# Altium PCB bch-stmnode_v0.2.PcbDoc (part 2 of 3)
Units mm, origin at the board's own origin, x right, y up, seen from the top; angles counter-clockwise.
Board outline 93.3 x 100 mm, 4 copper layers (Top Layer, GND, VCC, Bot Layer), stack 1.564 mm thick; 151 components, 115 nets, 605 pads, 422 vias.
Unrouted connection lines stored in the file: 4.
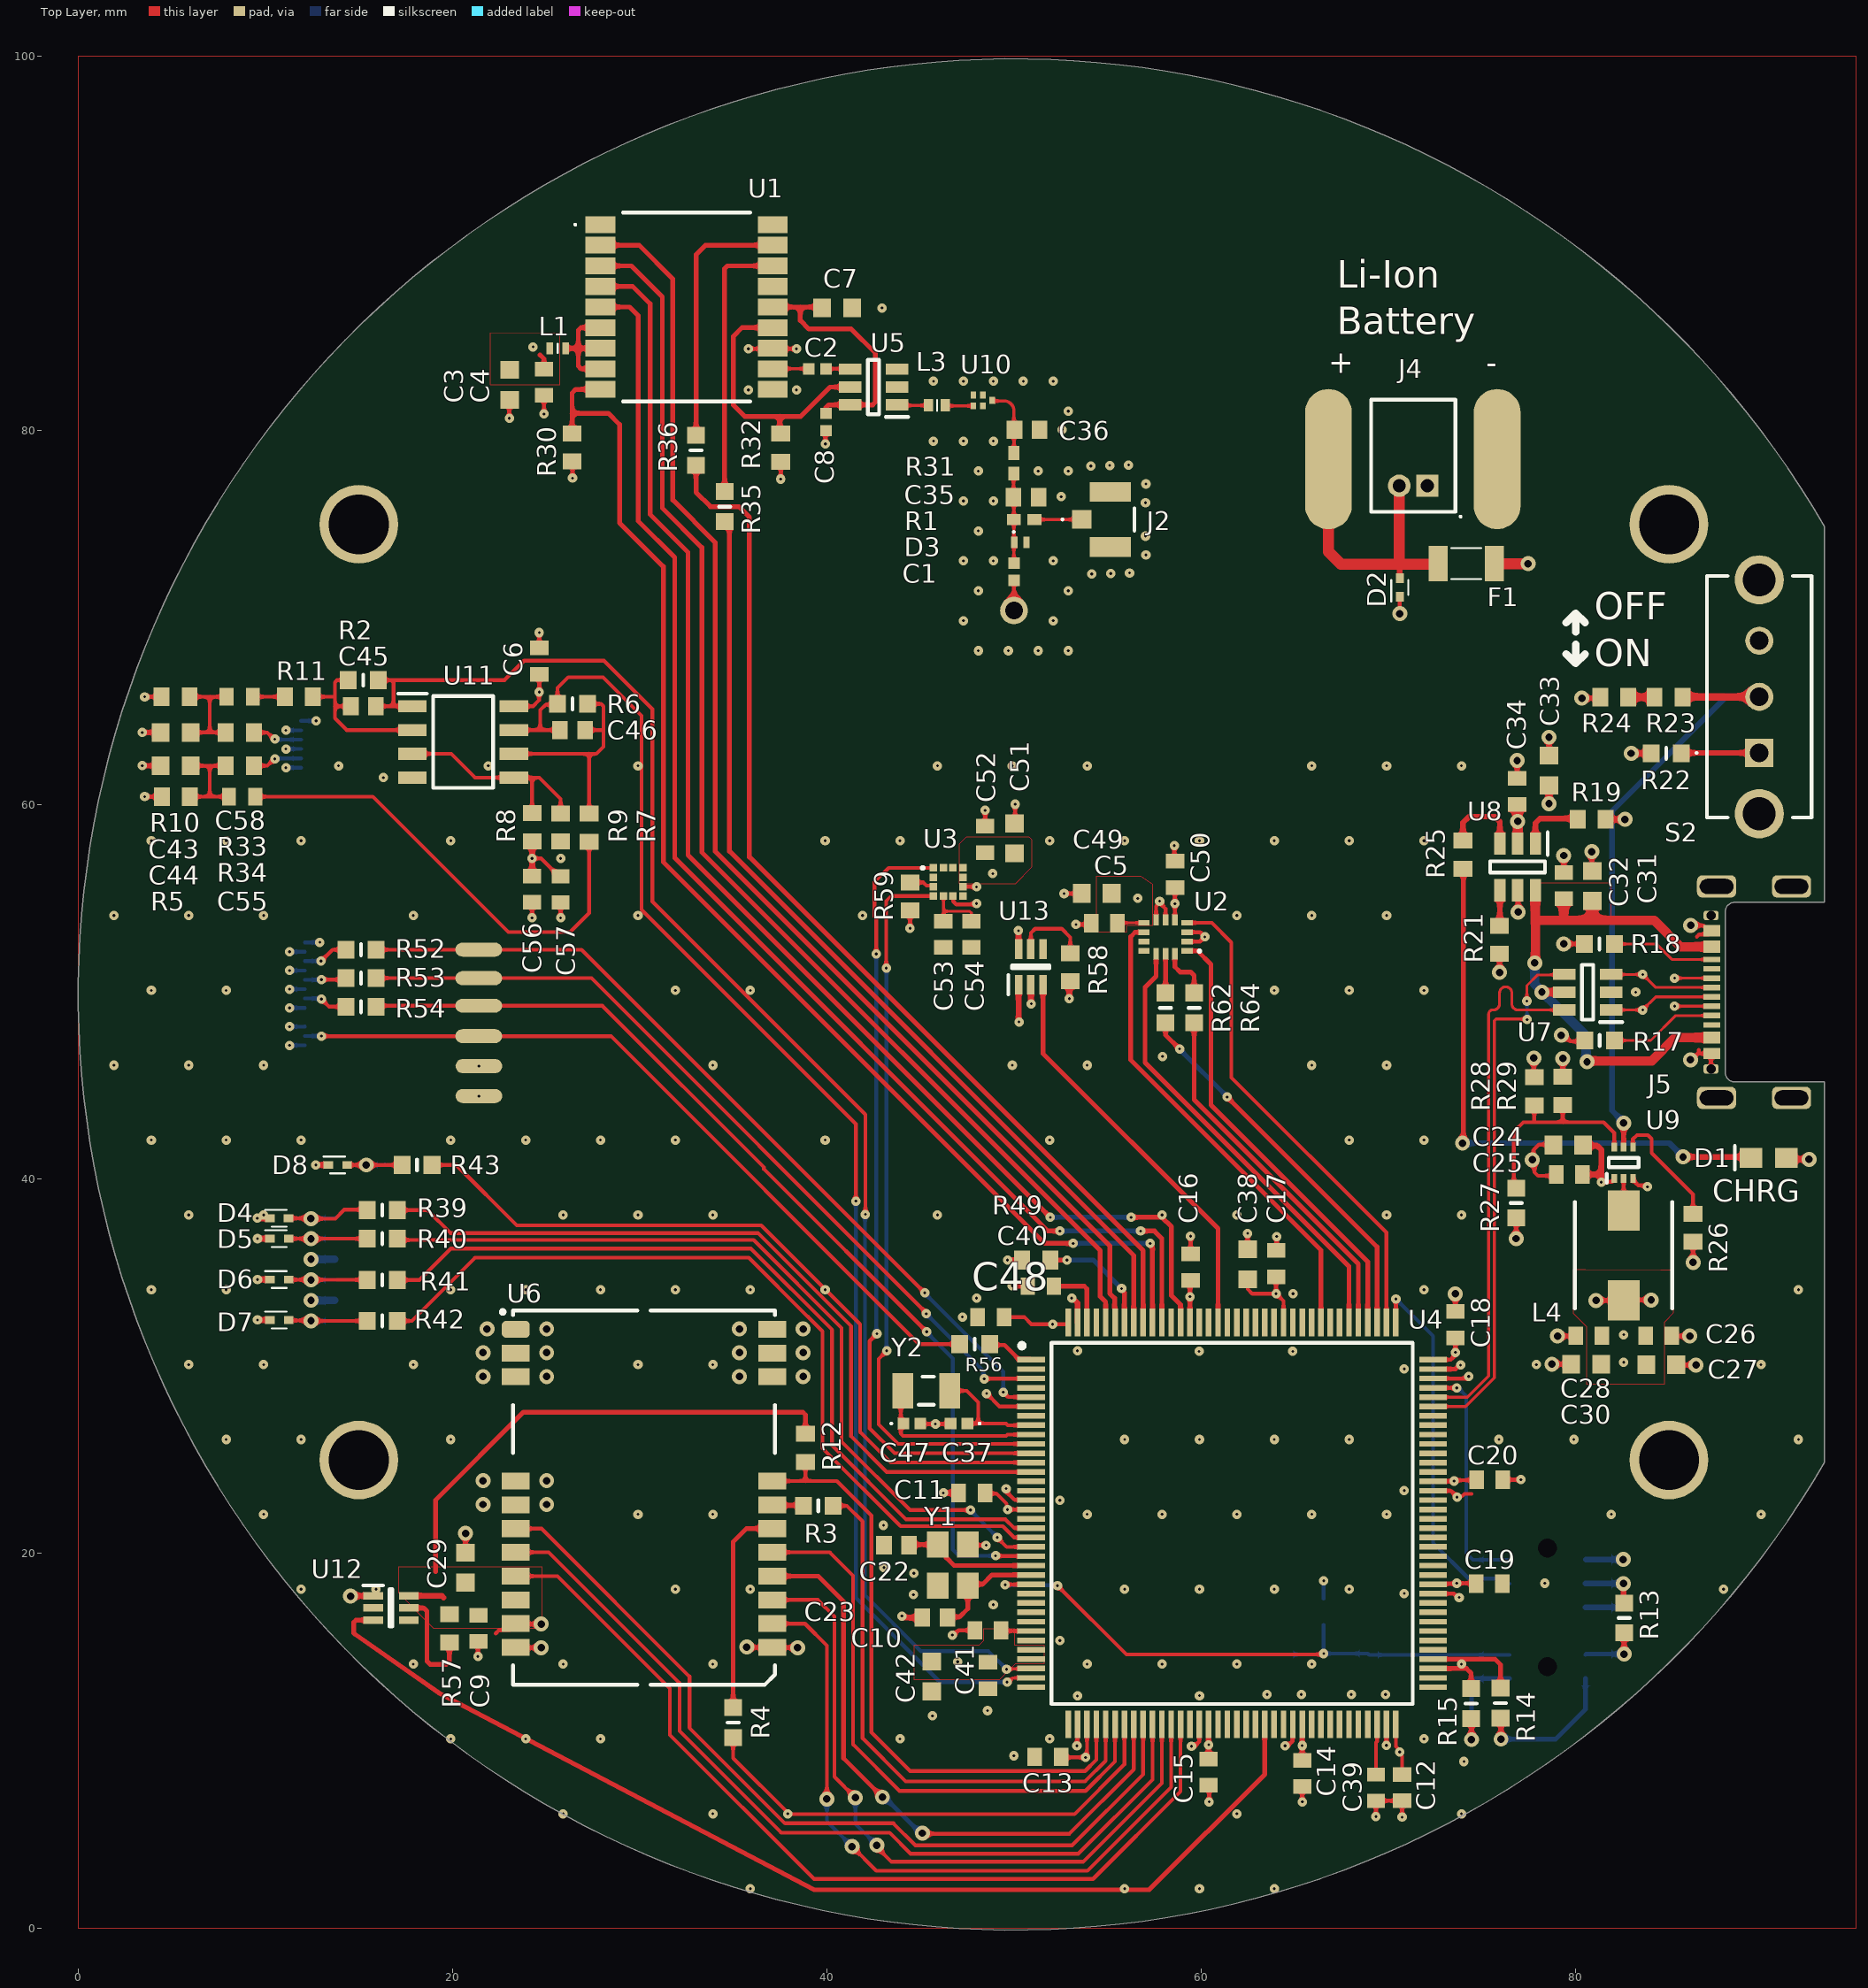
[diagram p0: Top Layer view]

## Part data (continued)
U4: "STM32H563ZIT6", Manufacturer_Name=STMicroelectronics, Mouser Part Number=511-STM32H563ZIT6, Arrow Part Number=STM32H563ZIT6, Arrow Price/Stock=https://www.arrow.com/en/products/stm32h563zit6/stmicroelectronics?utm_currency=USD&region=nac, Datasheet Link=https://www.st.com/resource/en/datasheet/stm32h562ag.pdf, Height=1.6mm, Manufacturer_Part_Number=STM32H563ZIT6, Mouser Price/Stock=https://www.mouser.co.uk/ProductDetail/STMicroelectronics/STM32H563ZIT6?qs=amGC7iS6iy9kqsV9OIos2w%3D%3D
U5: "1.55GHz~1.615GHz 21.5dB 1.4V~3.6V 0.8dB -14dBm 4.3mA DFN-6(1x1.6) RF Amplifiers RoHS", Manufacturer_Name="Hangzhou ZhongKe Microelectronics", Manufacturer_Part_Number=AT2659S, Datasheet Link=http://lanzhi-tech.com/filedownload/89817, Height=1.25mm
U6: library part EMCU+E22-900M22S, "-147dBm 22.3dBm 7km SPI SMD,14x20mm LoRa Modules ROHS"
U7: library part EU+ESDUSBLC6, "Low Cap. ESD Protection Auto SOT-23-6 STMicroelectronics USBLC6-2SC6Y, Dual Uni-Directional TVS Diode Array, 6-Pin SOT-23", Manufacturer_Name=STMicroelectronics, Mouser Part Number=511-USBLC6-2SC6Y, Arrow Part Number=USBLC6-2SC6Y, Arrow Price/Stock=https://www.arrow.com/en/products/usblc6-2sc6y/stmicroelectronics.html?utm_currency=USD&region=nac, Datasheet Link=https://www.st.com/resource/en/datasheet/usblc6-2sc6y.pdf, Geometry.Height=1.45mm, Manufacturer_Part_Number=USBLC6-2SC6Y, Mouser Price/Stock=https://www.mouser.co.uk/ProductDetail/STMicroelectronics/USBLC6-2SC6Y?qs=gNDSiZmRJS%2FOgDexvXkdow%3D%3D
U8: library part EU+BQ21040DBVR, "Battery Management 1-cell 0.8-A Li-ion and Li-polymer batt A 595-BQ21040DBVT", Manufacturer_Name="Texas Instruments", Mouser Part Number=595-BQ21040DBVR, Arrow Part Number=BQ21040DBVR, Arrow Price/Stock=https://www.arrow.com/en/products/bq21040dbvr/texas-instruments?utm_currency=USD&region=nac, Datasheet Link=http://www.ti.com/lit/gpn/bq21040, Height=1.45mm, Manufacturer_Part_Number=BQ21040DBVR, Mouser Price/Stock=https://www.mouser.co.uk/ProductDetail/Texas-Instruments/BQ21040DBVR?qs=cttFivMKqWyovUuY6Xwwcw%3D%3D
U9: library part EU+TPS563252DRLR, "Switching Voltage Regulators 3-V to 17-V input vo ltage 3-A 1.2-Mhz", Manufacturer_Name="Texas Instruments", Mouser Part Number=595-TPS563252DRLR, Arrow Part Number=TPS563252DRLR, Arrow Price/Stock=https://www.arrow.com/en/products/tps563252drlr/texas-instruments?utm_currency=USD&region=nac, Datasheet Link=https://www.ti.com/lit/ds/symlink/tps563252.pdf?ts=1715244064437&ref_url=https%253A%252F%252Fwww.mouser.in%252F, Height=0.6mm, Manufacturer_Part_Number=TPS563252DRLR, Mouser Price/Stock=https://www.mouser.co.uk/ProductDetail/Texas-Instruments/TPS563252DRLR?qs=ulEaXIWI0c%252BIcG7y3AlP5A%3D%3D
U10: library part EU+GNSSSAW, "Signal Conditioning - 40 C to + 85 C 1.5824 GHz 1 dB 2 MHz, 4.092 MHz, 8.34 MHz 50 Ohms GNSS", Arrow Part Number=B39162B4327P810, Manufacturer_Name=RF360, Mouser Part Number=871-B39162B4327P810, Arrow Price/Stock=https://www.arrow.com/en/products/b39162b4327p810/qualcomm-rf360-a-qualcomm-tdk-joint-venture?region=nac, Datasheet Link=https://mm.digikey.com/Volume0/opasdata/d220001/medias/docus/992/B39162B4327P810_Rev2.2.pdf, Height=0.45mm, Manufacturer_Part_Number=B39162B4327P810, Mouser Price/Stock=https://www.mouser.co.uk/ProductDetail/RF360/B39162B4327P810?qs=lGUynpphgXxwtn5A8O%2FIyg%3D%3D
U11: library part EU+OPA2607IDR, "Operational Amplifiers - Op Amps Dual-channel low-po wer precision 50-M", Arrow Part Number=OPA2607IDR, Manufacturer_Name="Texas Instruments", Mouser Part Number=595-OPA2607IDR, Arrow Price/Stock=https://www.arrow.com/en/products/opa2607idr/texas-instruments, Datasheet Link=https://www.ti.com/lit/ds/symlink/opa2607.pdf, Height=1.75mm, Manufacturer_Part_Number=OPA2607IDR, Mouser Price/Stock=https://www.mouser.co.uk/ProductDetail/Texas-Instruments/OPA2607IDR?qs=zW32dvEIR3ss%2FpWvIqcTXw%3D%3D
U12 U13: library part EU+TPS22919, "Power Switch ICs - Power Distribution 1-ch 5.5V 1.5A 90 mOhm self-protected AE", Manufacturer_Name="Texas Instruments", Manufacturer_Part_Number=TPS22919QDCKRQ1, Mouser Part Number=595-TPS22919QDCKRQ1, Datasheet Link=https://www.ti.com/lit/gpn/tps22919-q1, Height=1.1mm, Mouser Price/Stock=https://cz.mouser.com/ProductDetail/Texas-Instruments/TPS22919QDCKRQ1?qs=sGAEpiMZZMvjbjwkTuU2aX%252BB0PF2SxcjkwPe0jmTNxcgLPqTFcsPcA%3D%3D
Y1: library part ECR+24MHZ, "Crystals WE-XTAL 24.0MHz 15ppm 3.2 x 2.5mm", Manufacturer_Name="Wurth Elektronik", Manufacturer_Part_Number=830107006509, Mouser Part Number=710-830107006509, Datasheet Link=https://www.we-online.com/catalog/datasheet/830107006509.pdf, Height=0.8mm, Mouser Price/Stock=https://www.mouser.co.uk/ProductDetail/Wurth-Elektronik/830107006509?qs=hWgE7mdIu5QkYkvr4tcl2g%3D%3D
Y2: library part ECR+32.768KHz, "Crystals WE-XTAL 32.768 kHz 7pF 70kOhms", Manufacturer_Name="Wurth Elektronik", Manufacturer_Part_Number=830009709, Mouser Part Number=710-830009709, Datasheet Link=https://www.we-online.com/catalog/datasheet/830009709.pdf, Height=0.9mm, Mouser Price/Stock=https://www.mouser.co.uk/ProductDetail/Wurth-Elektronik/830009709?qs=2WXlatMagcG5opfa%252B%2FO2MQ%3D%3D

## Free pads (board coordinates)
  oval 2.5x7.5 smd: 4(66.802,78.486) 4(75.819,78.486)
  oval 2.5x0.75 smd: 5(21.406,52.273) 6(21.406,50.749) 7(21.406,49.276) 8(21.406,47.65) 8(21.413,44.45) 8(21.413,46.05)

## Via types
v1: diameter 0.5, hole 0.15, Top Layer to Bot Layer, 346 vias
v2: diameter 0.8, hole 0.4, Top Layer to Bot Layer, 76 vias

## Nets (pads, with @x,y where several pads share a name; then routed paths per layer and width w, separated by ;. In a path a pad name is that pad's centre, name@x,y a point inside that pad or via, vN(x,y) a via of type N, cw(c..) or ccw(c..) an arc to the next point about the centre after c; other vN are vias at no path point)
1PPS: U1.4 U4.132 | length 72.7
  Top Layer w0.254: U1.4@27.912,87.714 29.634,87.714 30.556,86.792 30.556,75.54 32.588,73.508 32.588,57.324 51.939,37.973 v1(51.943,37.973) ; v1(56.261,37.973) 57.912,37.973 58.42,37.465 58.42,33.782 58.902,33.3 U4.132@58.902,32.348
  Bot Layer w0.254: v1(51.943,37.973) v1(56.261,37.973)
1V65_REF_7: R8.1 R9.2 U11.3 U11.5 | length 11.6
  Top Layer w0.2: U11.3@17.863,62.738 19.939,62.738 21.209,61.468 U11.5@23.285,61.468 24.257,61.468 ; R8.1@24.257,59.563 24.257,61.468 ; R9.2@25.781,59.551 25.781,60.325 24.638,61.468 24.257,61.468
+3V: C3.1 C4.1 C6.1 C10.1 C11.1 C12.1 C13.1 C14.1 C15.1 C16.1 C17.1 C18.1 C19.1 C20.1 C26.1 C27.1 C28.1 C30.1 C38.1 C41.1 C42.1 C48.1 C56.1 C57.1 J3.3 J6.4 J10.1 J11.1 L1.1 L4.2 pad.8@21.413,44.45 R5.2 R8.2 R10.2 R26.2 R27.2 R30.2 U4.6 U4.17 U4.30 U4.32 U4.33 U4.39 U4.52 U4.62 U4.72 U4.84 U4.95 U4.106 U4.108 U4.121 U4.131 U4.144 U11.8 U12.1 U13.1 | length 60.1
  Top Layer w0.2: v1(3.556,60.452) R5.2@4.469,60.452 ; v1(3.556,65.786) R10.2@4.457,65.786 ; U11.8@23.285,65.278 24.308,65.278 24.627,65.597 24.627,66.029 v1(24.638,66.04) C6.1@24.638,66.991 ; v1(24.257,57.15) 24.735,57.15 25.686,56.199 C57.1@25.781,56.199 ; R30.2@26.391,78.358 26.416,78.332 v1(26.416,77.47) ; C11.1@48.452,23.241 48.485,23.208 49.055,23.208 49.6,22.663 49.6,22.409 v1(49.657,22.352) 49.661,22.356 50.91,22.356 U4.17@50.914,22.36 ; v1(48.539,28.55) 49.229,27.86 U4.6@50.914,27.86 ; C10.1@49.316,15.9 49.356,15.86 U4.30@50.914,15.86 ; C48.1@49.468,32.639 50.546,32.639 50.927,32.258 v1(52.07,32.258) 52.852,32.258 52.902,32.308 U4.144@52.902,32.348 ; C13.1@52.516,9.144 52.516,9.109 v1(53.825,9.109) 53.825,9.19 53.902,9.268 U4.39@53.902,10.872 ; C38.1@62.484,34.658 62.484,34.138 62.732,33.89 v1(64.008,33.89) ; C17.1@64.008,34.795 v1(64.008,33.89) ; U4.121@64.402,32.348 64.402,33.496 v1(64.008,33.89) ; U4.72@70.402,10.872 70.402,9.689 70.612,9.479 70.612,9.317 70.739,9.19 C12.1@70.739,8.193 ; U4.84@72.39,18.36 72.418,18.387 73.632,18.387 v1(73.66,18.415) 74.673,18.415 C19.1@74.691,18.397 ; U4.95@72.39,23.86 72.398,23.868 73.508,23.868 v1(73.516,23.876) ; U4.106@72.39,29.36 72.396,29.354 74.104,29.354 74.214,29.464 v1(74.295,29.464) ; U4.108@72.39,30.36 73.343,30.36 73.531,30.547 73.531,30.691 v1(73.588,30.748) ; v1@73.516,23.86 73.582,23.927 74.687,23.927 C20.1@74.713,23.952 ; C18.1@73.584,31.533 73.588,31.528 v1@73.588,30.677 ; v2(76.835,36.83) R27.2@76.835,37.935 ; v2(81.102,33.528) 82.562,33.528 L4.2@82.575,33.541 82.588,33.554 v2(84.049,33.554) ; v2(86.284,35.559) R26.2@86.284,36.664
  Top Layer w0.25: U4.131@59.402,32.348 59.402,34.064 ; C15.1@60.401,9.031 U4.52@60.402,10.872 ; U4.62@65.402,10.872 65.402,8.958 C14.1@65.405,8.955
  Top Layer w0.254: 24.684,84.049 24.892,83.841 24.892,83.421 24.923,83.389 24.909,83.375 24.938,83.346 C4.1@24.892,83.301 ; 59.406,34.068 59.406,34.576 C16.1@59.436,34.606
  Top Layer w0.3: v2@14.569,17.744 U12.1@15.763,17.744 ; C56.1@24.257,56.199 v1(24.257,57.15) R8.2@24.257,58.063 ; v1@50.252,48.427 U13.1@50.252,50.399
  Top Layer w0.4: v2(14.554,17.729) v2@14.569,17.744
  Bot Layer w0.2: J10.1@11.909,64.496 11.91,64.497 12.714,64.497 v1(12.715,64.499) ; J11.1@12.109,52.661 v1@12.912,52.661 ; J3.3@80.536,19.667 J3.3@80.555,19.685
  Bot Layer w0.3: J3.3@80.555,19.685 v2(82.55,19.685)
  Bot Layer w0.4: v2(12.446,35.728) J6.4@13.719,35.728 ; v1@12.912,52.661 v1(12.915,52.664)
  other v1: 70.612,9.398 65.402,9.74 60.402,9.782 46.99,14.224 82.575,30.226 82.575,31.699 59.402,33.727 21.413,44.45 50.272,48.407 24.308,84.48